# Allegro board tdr2003.brd
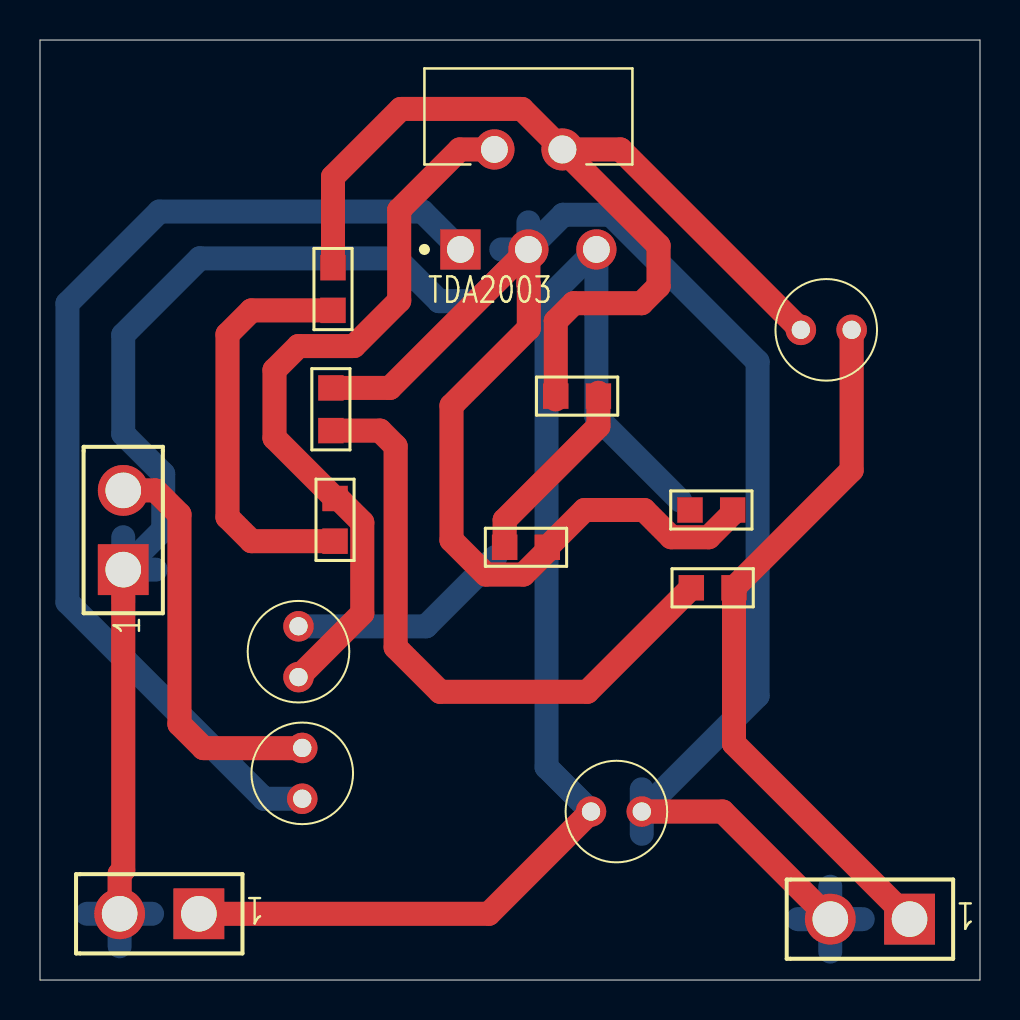
[diagram p0: board, top side]
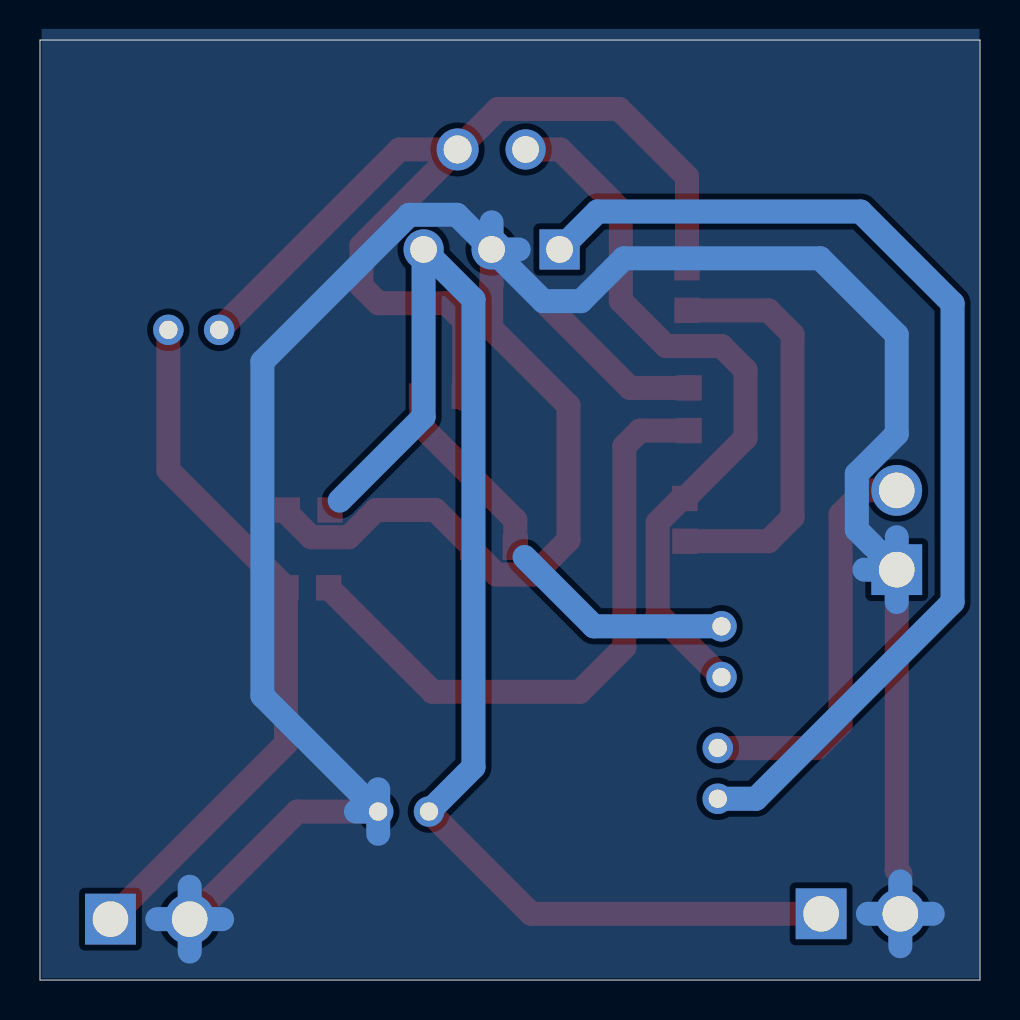
[diagram p1: board, bottom side, seen from below]

Outline 47 x 47 mm; copper layers: TOP, BOTTOM. Coordinates in mm from the lower left corner of the outline.
Outline path: 0,47 47,47 47,0 0,0 0,47

## Design rules (mm)
constraint set DEFAULT: min track width 1.2

## Placement (name value [footprint] x y rotation side)
A-IN  CON2  [BLKCON156VHTM1SQSW1562]  4.16 20.52 90 top
C1  C  [CAP196]  13.11 9.06 0 top
C2  C  [CAP196]  27.55 8.42 270 top
C3  CAPACITOR NON-POL  [SMC0805]  32.5 23.5 0 top
C4  C  [CAP196]  38.04 32.51 270 top
C5  CAPACITOR NON-POL  [SMC0805]  34.7 19.61 180 top
C6  C  [CAP196]  12.93 15.14 0 top
C7  CAPACITOR NON-POL  [SMC0805]  14.65 35.62 270 top
POWER  CON2  [BLKCON156VHTM1SQSW1562]  7.95 3.31 180 top
R1  R  [SMR0805]  14.54 27.47 90 top
R2  R  [SMR0805]  25.79 29.2 0 top
R3  R  [SMR0805]  23.23 21.64 0 top
R4  R  [SMR0805]  14.75 24.07 270 top
SPEAKER  CON2  [BLKCON156VHTM1SQSW1562]  43.48 3.04 180 top
U1  TDA200X  [TO170P1040X480X2115-5]  21.02 36.53 0 top

## Library data of the parts
A-IN POWER SPEAKER = CON2
C1 C2 C4 C6 = C: Tolerance: ***; User Part Number: ***
C3 C5 C7 = CAPACITOR NON-POL
R1-R4 = R
U1 = TDA200X

## Footprints (pads in the part's own frame, mm; a bottom-side part is the same pattern mirrored in y, then rotated)
BLKCON156VHTM1SQSW1562
  rect 2.54x2.54 hole 1.778: 1(0,0)
  round 2.54 hole 1.778: 2(3.962,0)
CAP196
  round 1.524 hole 0.914: 1(0,0) 2(0,2.54)
SMC0805
  rect 1.27x1.27 smd: 1(0,0) 2(2.134,0)
SMR0805
  rect 1.27x1.27 smd: 1(0,0) 2(2.134,0)
TO170P1040X480X2115-5
  rect 2.01x2.01 hole 1.34: 1(0,0)
  round 2.01 hole 1.34: 2(1.7,5) 3(3.4,0) 5(6.8,0)
  round 2.1 hole 1.4: 4(5.1,5)

## Nets
GND: A-IN.1 C2.2 C3.2 POWER.2 R1.2 R3.2 SPEAKER.2 U1.3
N00898: C1.1 U1.1
N00905: A-IN.2 C1.2
N00956: C2.1 C3.1 POWER.1 U1.5(VCC)
N01073: C4.1 C7.1 R2.1 U1.4
N01081: C4.2 C5.1 SPEAKER.1
N01115: C5.2 R1.1
N01144: C6.2 R2.2 R3.1
N01309: C6.1 R4.1 U1.2
N01473: C7.2 R4.2

## Routing (per net, layer and track width the routed paths; a pad name or vN(x,y) marks a point on that pad's centre or on a via; arc(x,y) is an arc through that point)
GND: length 176.4
  TOP w1.2: SPEAKER.2 34.14,8.42 C2.2 ; A-IN.1 4.16,5.49 3.98,5.31 POWER.2 ; R1.2 17.5,29.6 U1.3 24.42,34.8 24.44,34.78 24.44,32.59 20.57,28.72 20.57,21.99 22.3,20.27 24.17,20.27 25.37,21.47 R3.2 27.23,23.5 30.2,23.5 31.56,22.14 33.44,22.14 34.63,23.34 C3.2
  BOTTOM w1.2: 23.06,36.53 U1.3 ; U1.3 26.15,38.26 28.54,38.26 35.88,30.92 35.88,14.21 C2.2 ; U1.3 24.42,37.88 ; U1.3 21.84,33.94 19.95,33.94 17.81,36.09 7.99,36.09 4.16,32.26 4.16,27.3 6.16,25.31 6.16,22.51 A-IN.1 ; A-IN.1 5.78,20.52 ; A-IN.1 4.16,18.9 ; A-IN.1 4.16,22.14 ; SPEAKER.2 41.14,3.04 ; SPEAKER.2 37.89,3.04 ; SPEAKER.2 39.52,4.66 ; SPEAKER.2 39.52,1.42 ; 30.09,7.31 C2.2 ; C2.2 30.09,9.54 ; C2.2 31.2,8.42 ; POWER.2 3.98,4.93 ; POWER.2 5.6,3.31 ; POWER.2 2.36,3.31 ; POWER.2 3.98,1.69
N00898: length 53.1
  BOTTOM w1.2: U1.1 19.12,38.42 5.97,38.42 1.37,33.83 1.37,18.89 11.2,9.06 C1.1
N00905: length 20.4
  TOP w1.2: C1.2 13.11,11.6 8.17,11.6 6.97,12.79 6.97,23.28 5.77,24.48 A-IN.2
N00956: length 66.1
  TOP w1.2: POWER.1 22.44,3.31 C2.1
  BOTTOM w1.2: C2.1 25.33,10.64 25.33,34.03 U1.5 27.82,28.16 32.01,23.97
N01073: length 52.5
  TOP w1.2: U1.4 29.02,41.53 C4.1 ; U1.4 24.09,43.55 18.04,43.55 14.65,40.16 C7.1 ; U1.4 30.93,36.72 30.93,34.69 30.08,33.84 26.68,33.84 25.79,32.94 R2.1 25.79,29.03
N01081: length 35.5
  TOP w1.2: SPEAKER.1 34.7,11.82 C5.1 40.58,25.49 C4.2
N01115: length 31.5
  TOP w1.2: R1.1 17,27.47 17.78,26.68 17.78,16.63 20.01,14.41 27.37,14.41 C5.2
N01144: length 20.9
  TOP w1.2: 27.92,29.36 R2.2 27.92,27.69 23.23,23 R3.1
  BOTTOM w1.2: 22.77,21.15 19.3,17.68 C6.2
N01309: length 36.8
  TOP w1.2: C6.1 16.11,18.33 16.11,22.88 14.92,24.07 R4.1 11.72,27.1 11.72,30.5 12.93,31.7 15.7,31.7 17.96,33.96 17.96,38.5 20.99,41.53 U1.2
N01473: length 20.8
  TOP w1.2: C7.2 10.57,33.48 9.38,32.28 9.38,23.14 10.57,21.94 R4.2

## Copper pours and planes (outline as drawn; the poured copper is in the pictures)
GND on BOTTOM: 0.03,47.55 0.03,0.09 46.92,0.09 46.92,47.55
